# EAGLE board Project_Milestone04 v4.0.0 (EAGLE 9.2.0)
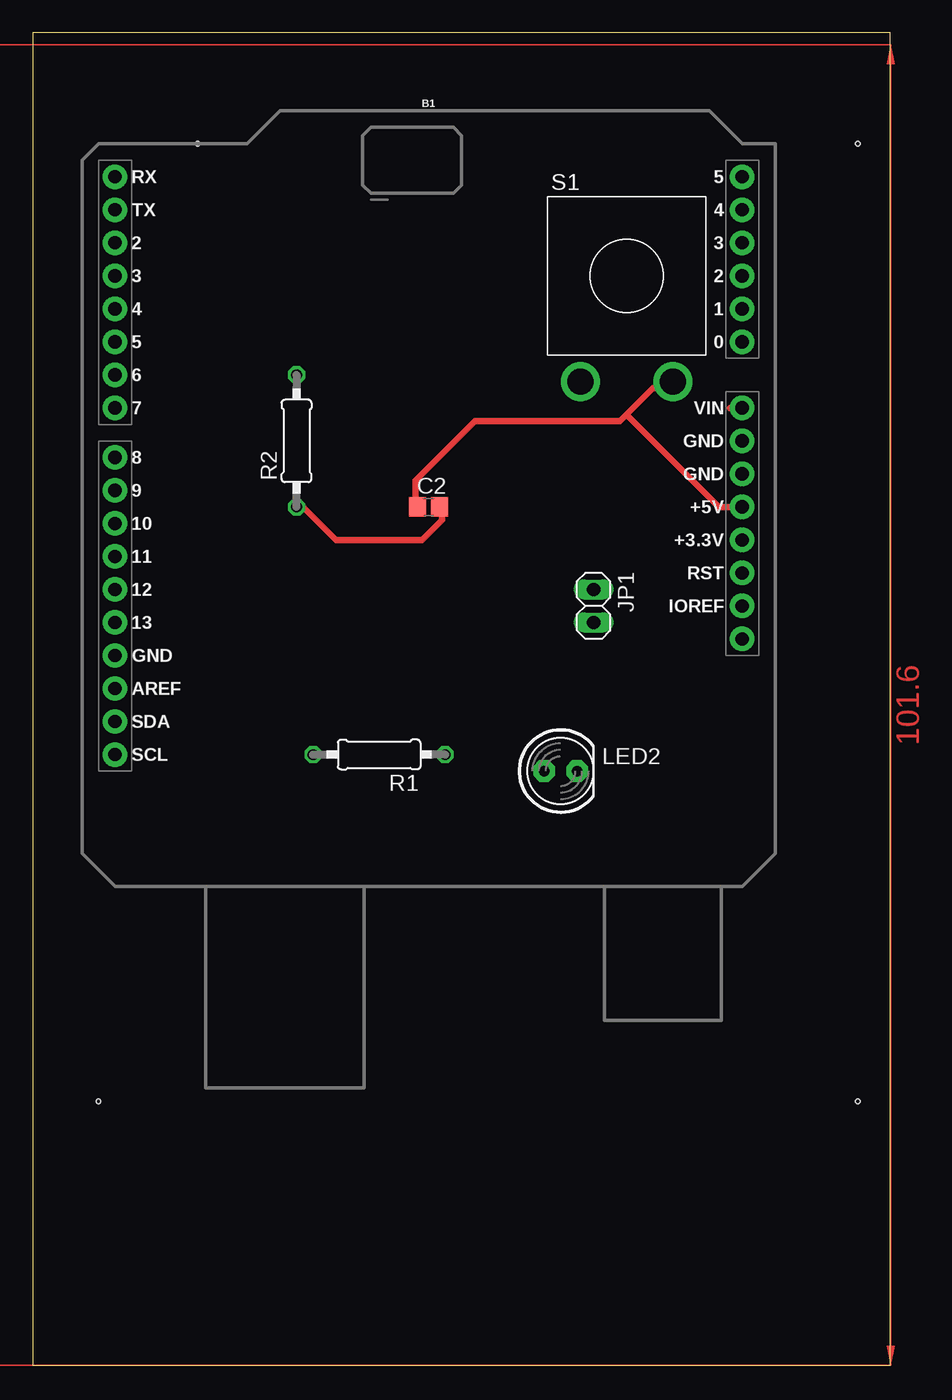
[diagram p0: board, top side]
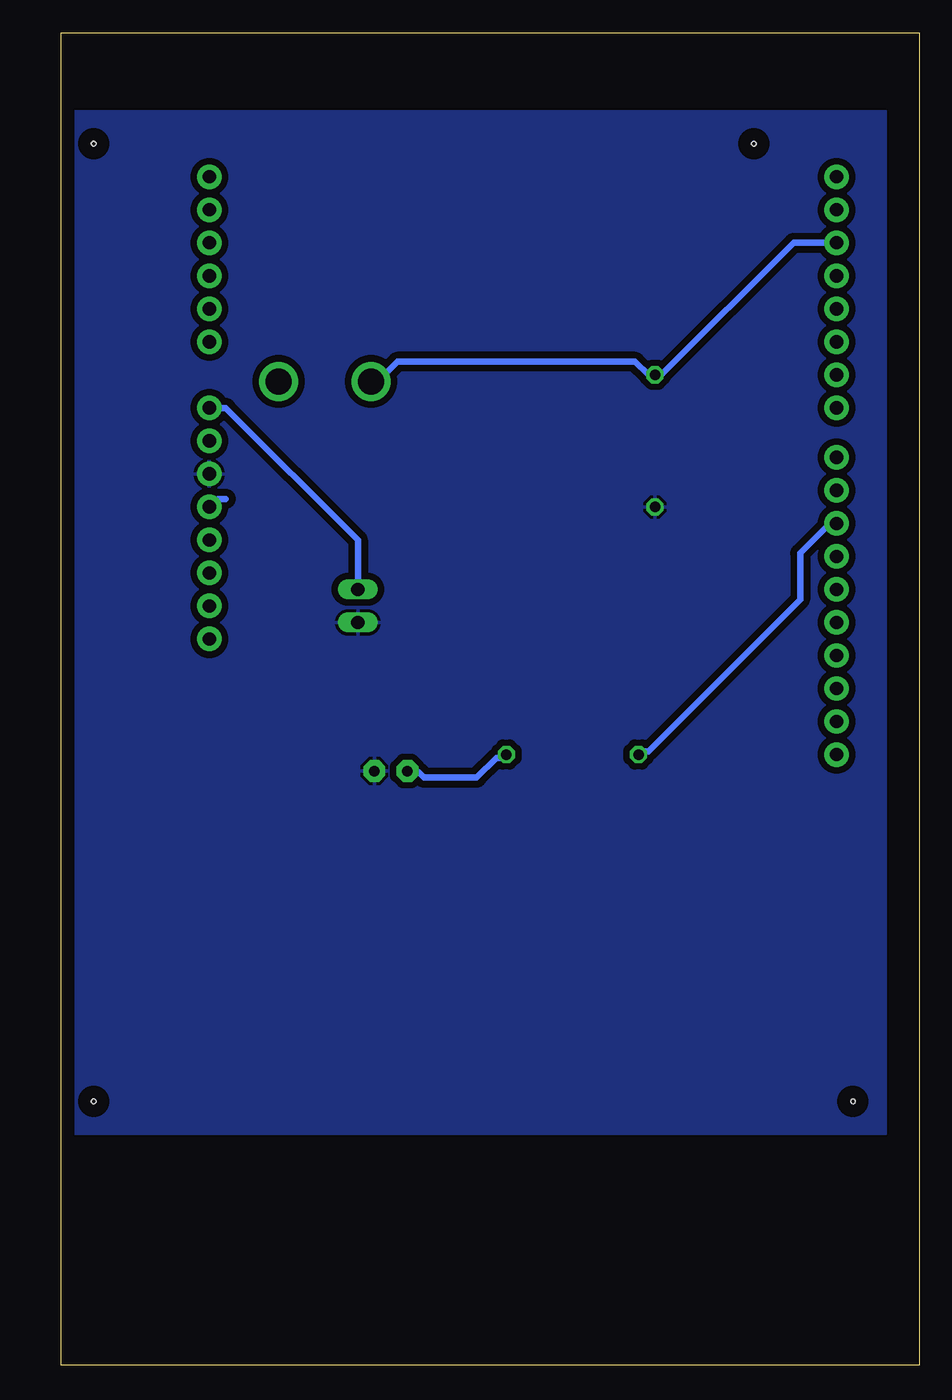
[diagram p1: board, bottom side, seen from below]

Size 66.02 x 102.54 mm. Coordinates in mm from the lower left corner, seen from the top.
Outline: 0,0 66.02,0 66.02,102.54 0,102.54 0,0
Copper layers (1*16): Top 0.035mm / dielectric 1.5mm / Bottom 0.035mm
Design rules "default": minimum track width 6mil, minimum drill 0.35mm, track to track 6mil, track to pad 6mil, pad to pad 6mil, via to via 6mil, smd to smd 6mil, copper to edge 40mil, drill to drill 6mil, minimum pad ring 10mil, minimum via ring 8mil, stop-mask expansion 4mil, vias tented up to drill 0mil, thermal gap 10mil
Net classes: 0 default: width 0.508 mm, drill 0.508 mm, clearance 0.508 mm
Holes 0.35 mm at 5.08,20.32 63.5,20.32 63.5,93.98 12.7,93.98

## Footprints (pad centres in the part's own frame; a part is rotated, then mirrored left to right if it is on the bottom)
UNO_R3_SHIELD = drill 1.016 pad 1.88: 3.3V 24.13,-2.54; 5V 24.13,0; A0 24.13,12.7; A1 24.13,15.24; A2 24.13,17.78; A3 24.13,20.32; A4 24.13,22.86; A5 24.13,25.4; AREF -24.13,-13.97; D2 -24.13,20.32; D3 -24.13,17.78; D4 -24.13,15.24; D5 -24.13,12.7; D6 -24.13,10.16; D7 -24.13,7.62; D8 -24.13,3.81; D9 -24.13,1.27; D10 -24.13,-1.27; D11 -24.13,-3.81; D12 -24.13,-6.35; D13 -24.13,-8.89; GND@0 24.13,2.54; GND@1 24.13,5.08; GND@2 -24.13,-11.43; IOREF 24.13,-7.62; NC 24.13,-10.16; RES 24.13,-5.08; RX -24.13,25.4; SCL -24.13,-19.05; SDA -24.13,-16.51; TX -24.13,22.86; VIN 24.13,7.62
C0805 = smd 1.3 x 1.5: 1 -0.85,0; 2 0.85,0
1X02 = drill 1.016 long: 1 -1.27,0; 2 1.27,0
LED5MM = drill 0.813 pad 1.676 octagon: A -1.27,0; K 1.27,0
0207/10 = drill 0.813 octagon: 1 -5.08,0; 2 5.08,0
JUDCOSPST = drill 2: P 3.556,-8.128; T -3.556,-8.128

## Placement (x,y rotation side)
B1  ARDUINO_UNO_R3_SHIELDBASIC  [UNO_R3_SHIELD]  30.48,66.04 0 top
C2  10F  [C0805]  30.48,66.04 0 top
JP1  [1X02]  43.18,58.42 270 top
LED2  [LED5MM]  40.64,45.72 0 top
R1  100k  [0207/10]  26.67,46.99 180 top
R2  100k  [0207/10]  20.32,71.12 90 top
S1  SPST  [JUDCOSPST]  45.72,83.82 0 top

## Library data of the parts
B1 = SparkFun-Boards
C2 LED2 S1 = adafruit
JP1 = pinhead
R1 R2 = rcl; SPICEPREFIX: R

## Nets
GND: B1.GND@0 C2.2 JP1.2 LED2.K R2.1
N$1: B1.VIN JP1.1
N$2: B1.D10 R1.2
N$4: LED2.A R1.1
N$7: B1.D2 R2.2 S1.T
VCC: B1.5V C2.1 S1.P

## Tracks (layer width: path | path; a pad name or v marks a point on that pad's centre or on a via)
GND
  Top 0.508: R2.1 20.83,66.04 23.37,63.5 29.97,63.5 31.5,65.02 31.5,66.04 C2.2
  pour Bottom: 2.54,96.52 2.54,17.78 66.04,17.78 66.04,96.52
N$1
  Top 0.508: B1.VIN 53.64,73.66 | 43.28,59.94 JP1.1
  Bottom 0.508: JP1.1 43.18,63.5 53.34,73.66 53.85,73.66 54.36,74.17 54.86,73.66 B1.VIN
N$2
  Top 0.508: 6.4,64.82 B1.D10
  Bottom 0.508: R1.2 21.34,47.24 20.83,47.24 9.14,58.93 9.14,62.48 6.6,65.02 B1.D10
N$4
  Bottom 0.508: 39.12,45.62 LED2.A 39.62,45.72 39.12,46.23 38.1,45.21 34.04,45.21 32.51,46.74 32,46.74 R1.1
N$7
  Bottom 0.508: 42.06,75.49 S1.T 41.66,75.69 40.13,77.22 21.84,77.22 20.83,76.2 R2.2 19.81,76.2 9.65,86.36 B1.D2
TOP
  pour Top: 66.04,17.78
VCC
  Top 0.508: 45.72,73.15 47.75,75.18 48.77,75.18 S1.P | 45.72,73.15 45.21,72.64 34.04,72.64 29.46,68.07 29.46,66.04 C2.1 | B1.5V 52.83,66.04 45.72,73.15
  Bottom 0.508: 53.34,66.65 53.95,66.65 54.56,66.04 B1.5V | 49.68,75.49 49.38,75.49 S1.P
(copper drawn outside any net)
  shapes: Top area x2